# Altium PCB flyback_pcbdesing.PcbDoc
Units mm, origin at the board's own origin, x right, y up, seen from the top; angles counter-clockwise.
Board outline 126.62 x 105.79 mm, 2 copper layers (Top Layer, Bottom Layer); 61 components, 35 nets, 169 pads, 4 vias.
Unrouted connection lines stored in the file: 2.
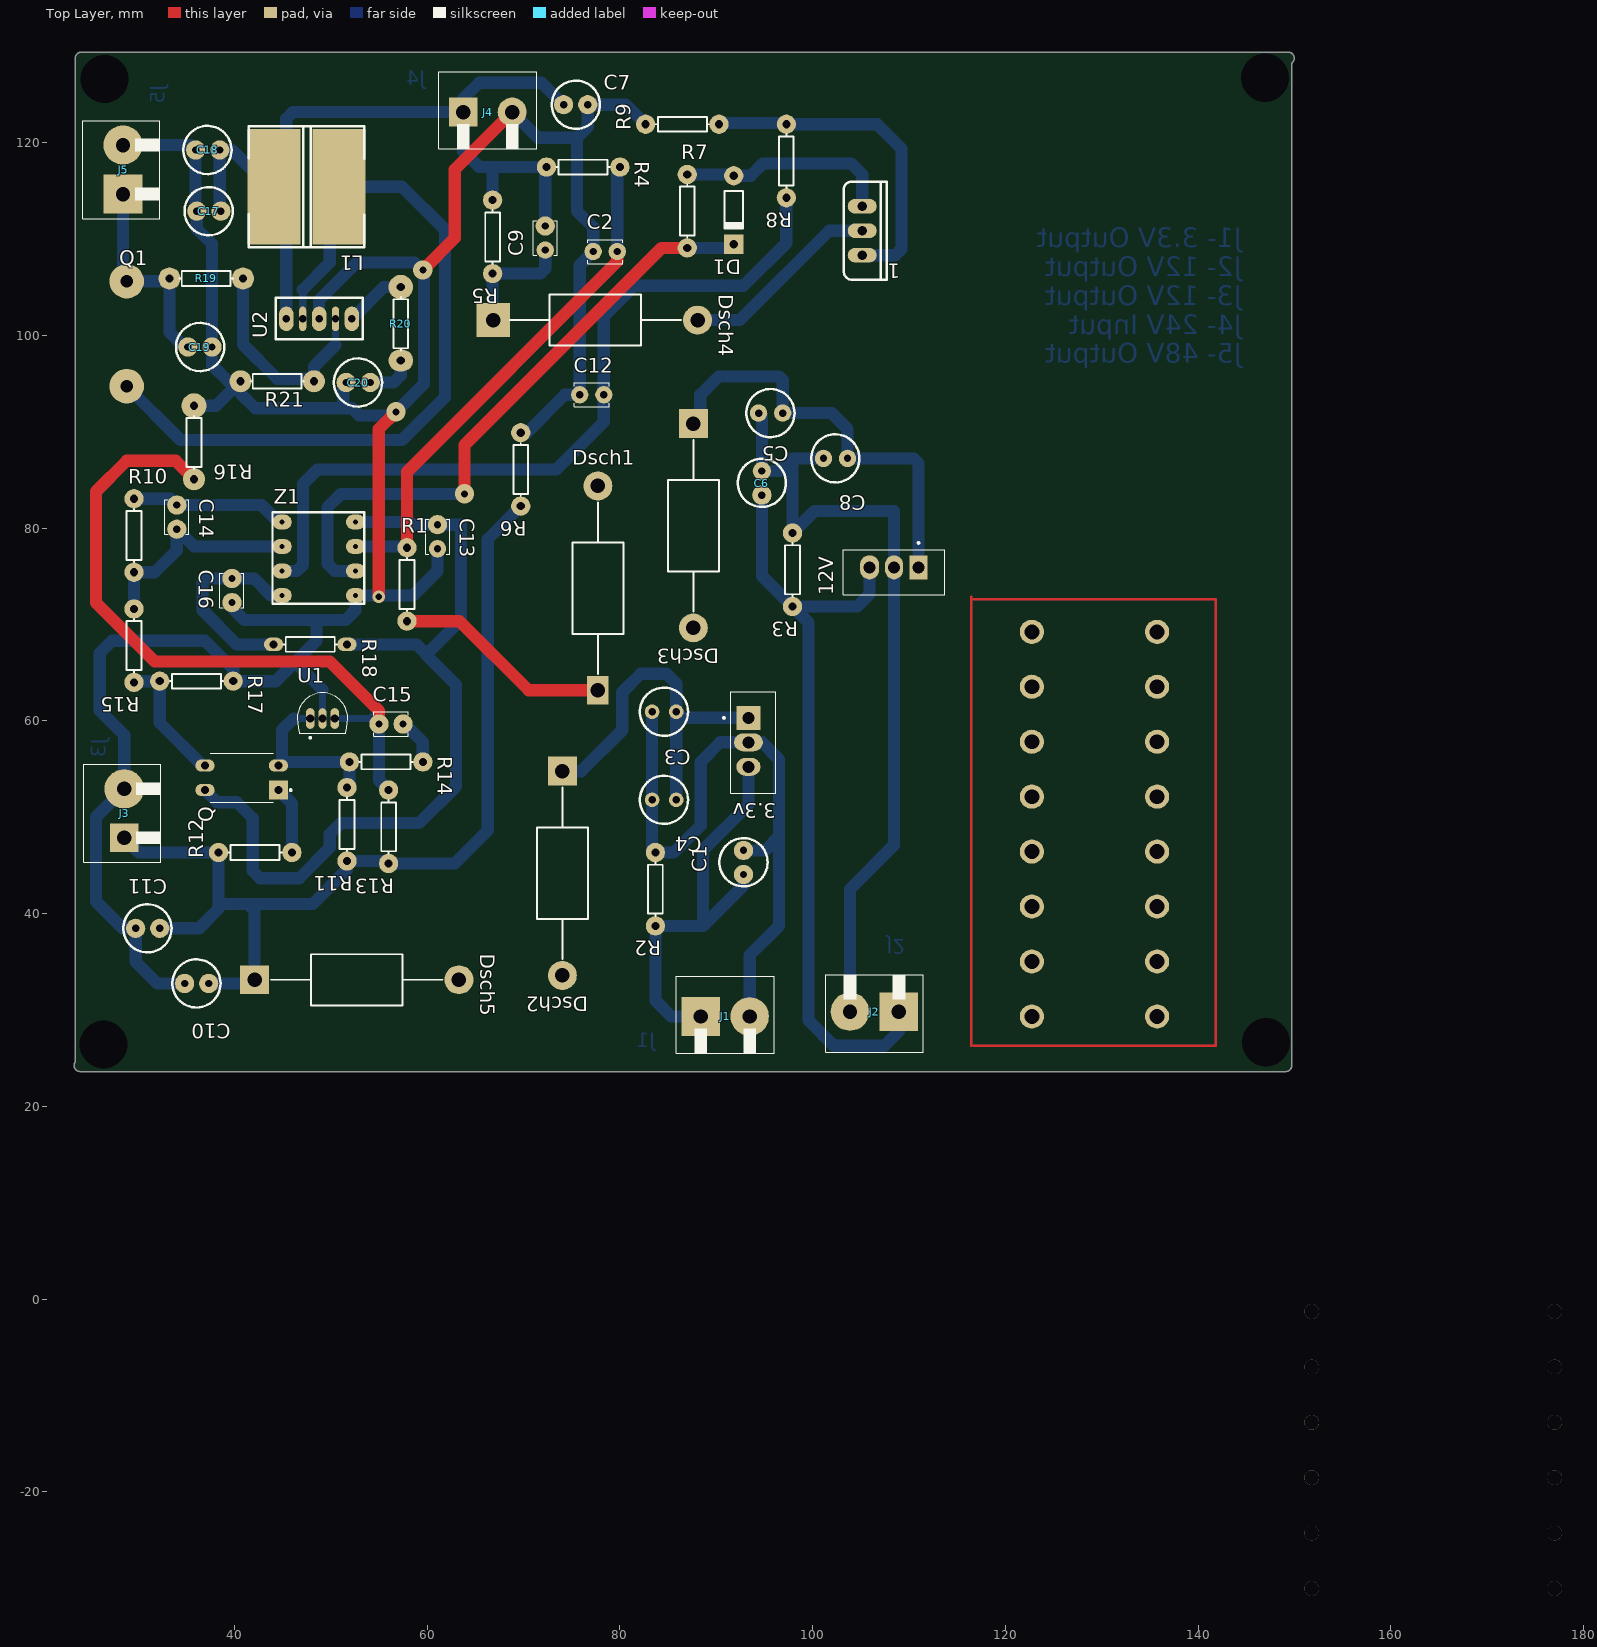
[diagram p0: Top Layer view]
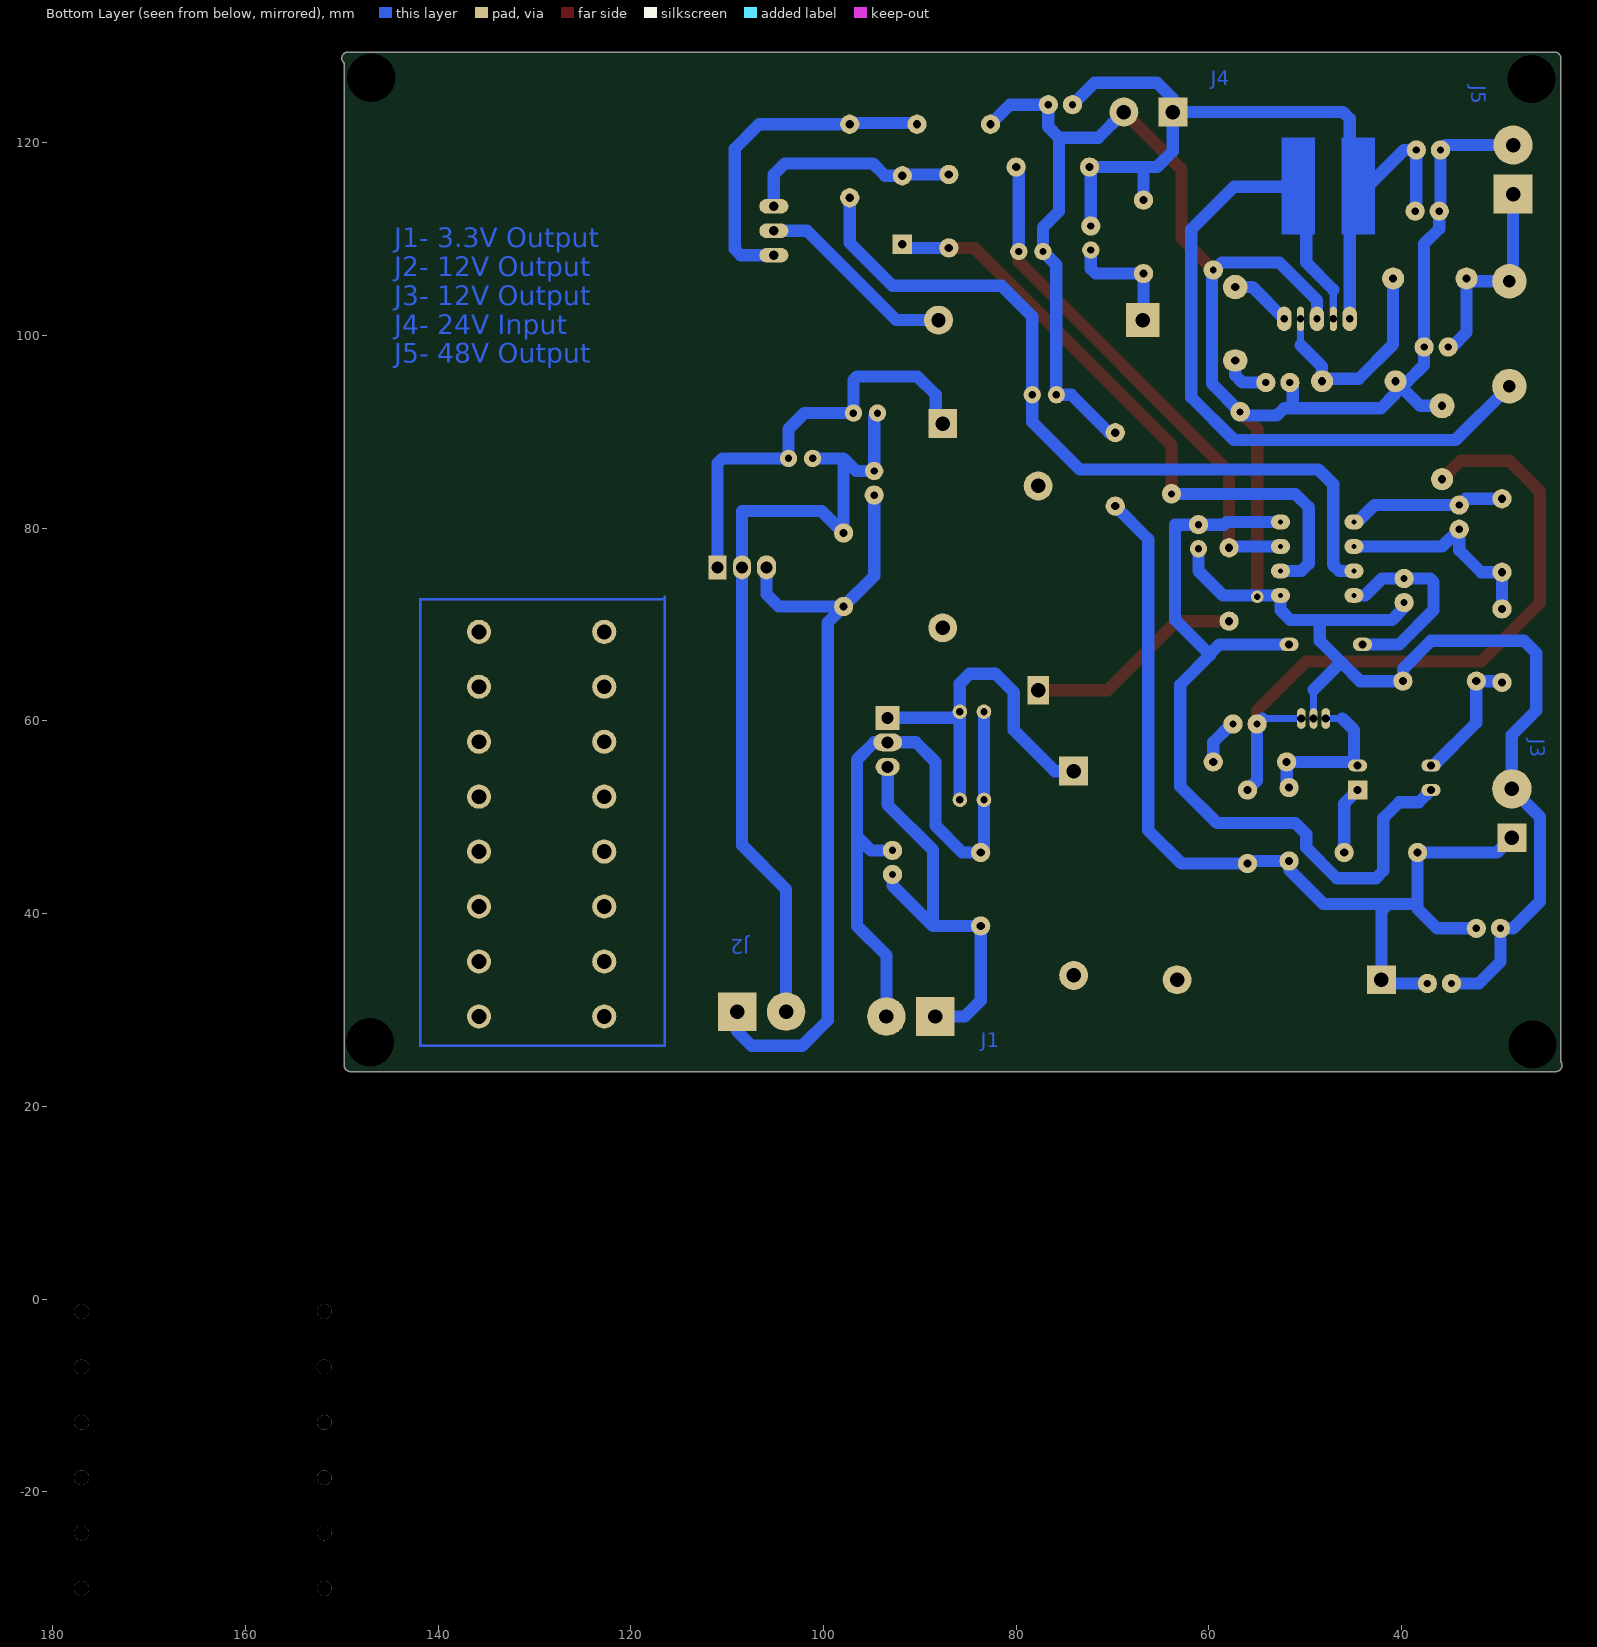
[diagram p1: Bottom Layer view, seen from below]

## Layer stack, top to bottom
Top Solder: solder mask 0.0102, Solder Resist, Dk 3.5
Top Layer: signal copper 0.0356
Dielectric 1: dielectric 0.32, FR-4, Dk 4.8
Bottom Layer: signal copper 0.0356
Bottom Solder: solder mask 0.0102, Solder Resist, Dk 3.5

## Board outline
24.003,23.622 cw(c24.003,24.257) 23.495,24.638 23.495,128.778 cw(c24.13,128.778) 24.13,129.413 149.352,129.413 cw(c149.352,128.778) 149.987,128.778 cw(c149.352,128.778) 149.733,128.27 149.733,24.257 cw(c149.098,24.257) 149.098,23.622

## Design rules (kind name [scope] priority, off if disabled: settings)
Clearance [All] p1: gap=0.254
PolygonConnect [All] p1: connectstyle=Relief reliefconductorwidth=0.254 reliefentries=4 polygonreliefangle="90 Angle" airgapwidth=0.254
RoutingVias [All] p1: holewidth=0.711 width=1.27 viastyle="Through Hole" minholewidth=0.711 minwidth=1.27 maxholewidth=0.711 maxwidth=1.27
SolderMaskExpansion [All] p1: expansion=0.102
Width [All] p1: maxlimit=1.27 minlimit=0.508 preferedwidth=1.27
30 further rules are at their usual default settings.

## Components (designator, comment, footprint, x,y, rotation, side; value= is the part's Value field where it differs from the comment)
1 "IRFZ44NPBF" TO-220 105.156,110.871 r270 top
3.3v "LM7812CT/NOPB" TO254P1054X470X1955-3#1 93.345,57.785 r270 top
12V "LM7812CT/NOPB" TO254P1054X470X1955-3#2 108.458,75.946 r180 top
C1 "Cap" Cap1#1 92.837,44.069 r90 top
C2 "120u" CAP_RCER72A472K0A2H03B#1 78.486,108.712 r0 top
C3 "Cap" Cap1#2 85.852,60.96 r180 top
C4 "Cap" Cap1#2 85.852,51.816 r180 top
C5 "Cap" Cap1#3 96.901,91.948 r180 top
C6 "Cap" Cap1#4 94.742,83.439 r90 top
C7 "Cap" Cap1#1 74.168,123.952 r0 top
C8 "Cap" Cap1#3 103.632,87.249 r180 top
C9 "10nF" CAP_RCER72A472K0A2H03B#2 72.263,110.109 r90 top
C10 "Cap" Cap1#1 37.338,32.766 r180 top
C11 "Cap" Cap1#1 32.258,38.481 r180 top
C12 "470pF" CAP_RCER72A472K0A2H03B#1 77.089,93.853 r0 top
C13 "1u" CAP_RCER72A472K0A2H03B#3 61.087,79.121 r270 top
C14 "10n" CAP_RCER72A472K0A2H03B#4 34.036,81.153 r270 top
C15 "20n" CAP_RCER72A472K0A2H03B#4 56.261,59.69 r0 top
C16 "1n" CAP_RCER72A472K0A2H03B#4 39.751,73.533 r270 top
C17 "Cap" Cap1#1 38.608,112.903 r180 top
C18 "Cap" Cap1#1 38.481,119.253 r180 top
C19 "Cap" Cap1#1 35.179,98.806 r0 top
C20 "Cap" Cap1#1 54.102,95.123 r180 top
D1 "Diode 1N4148" DO-35 91.821,113.03 r270 top
Dsch1 "1N5822" DIOAD2120W130L950D530P#1 77.724,73.787 r90 top
Dsch2 "1N5822" DIOAD2120W130L950D530P#2 74.041,44.196 r270 top
Dsch3 "1N5822" DIOAD2120W130L950D530P#2 87.63,80.264 r270 top
Dsch4 "1N5822" DIOAD2120W130L950D530P#3 77.47,101.6 r0 top
Dsch5 "1N5822" DIOAD2120W130L950D530P#2 52.705,33.147 r0 top
J1 "1760510000" 1760490000#1 88.392,29.337 r0 top
J2 "1760510000" 1760490000#1 108.966,29.845 r180 top
J3 "1760510000" 1760490000#2 28.575,47.879 r90 top
J4 "1760510000" 1760490000#3 63.754,123.19 r0 top
J5 "1760510000" 1760490000#4 28.448,114.681 r90 top
L1 "Inductor" Inductor2 47.498,115.443 r180 top
Q "PC817A" DIP762W50P254L650H458Q4B 40.767,54.102 r180 top
Q1 "DIODE_SCHOTTKY_10MQ100NPBF" Schottky 28.829,87.63 r90 top
R1 "Res1" AXIAL-0.3#1 57.912,74.168 r90 top
R2 "Res1" AXIAL-0.3#1 83.693,42.545 r270 top
R3 "Res1" AXIAL-0.3#1 97.917,75.692 r270 top
R4 "Res1" AXIAL-0.3#1 76.2,117.475 r0 top
R5 "Res1" AXIAL-0.3#1 66.802,110.236 r270 top
R6 "Res1" AXIAL-0.3#1 69.723,86.106 r270 top
R7 "Res1" AXIAL-0.3#1 86.995,112.903 r90 top
R8 "Res1" AXIAL-0.3#1 97.282,118.11 r270 top
R9 "Res1" AXIAL-0.3#1 86.487,121.92 r180 top
R10 "Res1" AXIAL-0.3#1 29.591,79.248 r90 top
R11 "Res1" AXIAL-0.3#1 51.689,49.276 r270 top
R12 "Res1" AXIAL-0.3#1 42.164,46.355 r180 top
R13 "Res1" AXIAL-0.3#1 56.007,49.022 r270 top
R14 "Res1" AXIAL-0.3#1 55.753,55.753 r0 top
R15 "Res1" AXIAL-0.3#1 29.591,67.818 r270 top
R16 "Res1" AXIAL-0.3#2 35.814,88.9 r270 top
R17 "Res1" AXIAL-0.3#1 36.068,64.135 r0 top
R18 "Res1" AXIAL-0.3#3 47.879,67.945 r0 top
R19 "Res" AXIAL-0.3#4 37.084,105.918 r180 top
R20 "Res" AXIAL-0.3#5 57.277,101.219 r90 top
R21 "Res" AXIAL-0.3#4 44.45,95.25 r0 top
U1 "TL431CLP" TO-92 49.149,60.833 r0 top
U2 "LM2585T" LM2585T 52.197,101.727 r180 top
Z1 "TL3842" TL3842_PCBLIB 44.958,80.645 r0 top

## Footprints (in the part's own frame and the unit in brackets; to place one, negate y for a bottom-side part, rotate by r counter-clockwise, add the part's x,y. Pads: shape width x height; smd on the part's side, far side on the other; paste and mask are expansions set on the pad)
1760490000#1 [mm]
  rect 4x4 hole 1.5: 1(0,0)
  round 4 hole 1.5: 2(5.08,0)
  silkscreen extent -2.54,-3.81 7.62,4.2
1760490000#2 [mm]
  rect 3x3 hole 1.5: 1(0,0)
  round 4.079 hole 1.5: 2(5.08,0)
  silkscreen extent -2.54,-3.81 7.62,4.2
1760490000#3 [mm]
  rect 3x3 hole 1.5: 1(0,0)
  round 3 hole 1.5: 2(5.08,0)
  silkscreen extent -2.54,-3.81 7.62,4.2
1760490000#4 [mm]
  rect 4.079x4.079 hole 1.5: 1(0,0)
  round 4.079 hole 1.5: 2(5.08,0)
  silkscreen extent -2.54,-3.81 7.62,4.2
AXIAL-0.3#1 [mm] "Axial Device, Thru-Hole; 2 Leads; 0.3 in Pin Spacing"
  round 2 hole 0.85: 1(-3.81,0) 2(3.81,0)
  silkscreen extent -2.77,-0.76 2.77,0.76
AXIAL-0.3#2 [mm] "Axial Device, Thru-Hole; 2 Leads; 0.3 in Pin Spacing"
  round 2.6 hole 0.85: 1(-3.81,0)
  round 2.3 hole 0.85: 2(3.81,0)
  silkscreen extent -2.77,-0.76 2.77,0.76
AXIAL-0.3#3 [mm] "Axial Device, Thru-Hole; 2 Leads; 0.3 in Pin Spacing"
  oval 2x1.4 hole 0.85: 1(-3.81,0) 2(3.81,0)
  silkscreen extent -2.77,-0.76 2.77,0.76
AXIAL-0.3#4 [mm] "Axial Device, Thru-Hole; 2 Leads; 0.3 in Pin Spacing"
  round 2.289 hole 0.85: 1(-3.81,0) 2(3.81,0)
  silkscreen extent -2.77,-0.76 2.77,0.76
AXIAL-0.3#5 [mm] "Axial Device, Thru-Hole; 2 Leads; 0.3 in Pin Spacing"
  oval 2.289x2.543 hole 0.85: 1(-3.81,0)
  round 2.543 hole 0.85: 2(3.81,0)
  silkscreen extent -2.77,-0.76 2.77,0.76
Cap1#1 [mm]
  round 2 hole 0.762: 1(0,0) 2(2.5,0)
  silkscreen extent -1.23,-2.5 3.77,2.5
Cap1#2 [mm]
  round 1.524 hole 0.762: 1(0,0) 2(2.5,0)
  silkscreen extent -1.23,-2.5 3.77,2.5
Cap1#3 [mm]
  round 1.8 hole 0.762: 1(0,0) 2(2.5,0)
  silkscreen extent -1.23,-2.5 3.77,2.5
Cap1#4 [mm]
  round 2 hole 0.762: 1(0,0)
  round 1.9 hole 0.762: 2(2.5,0)
  silkscreen extent -1.23,-2.5 3.77,2.5
CAP_RCER72A472K0A2H03B#1 [mm]
  round 1.8 hole 0.75: 1(-1.25,0) 2(1.25,0)
  silkscreen extent -1.8,-1.25 1.8,1.25
CAP_RCER72A472K0A2H03B#2 [mm]
  round 1.8 hole 0.75: 1(-1.25,0)
  round 2 hole 0.75: 2(1.25,0)
  silkscreen extent -1.8,-1.25 1.8,1.25
CAP_RCER72A472K0A2H03B#3 [mm]
  round 2 hole 0.75: 1(-1.25,0)
  round 1.8 hole 0.75: 2(1.25,0)
  silkscreen extent -1.8,-1.25 1.8,1.25
CAP_RCER72A472K0A2H03B#4 [mm]
  round 2 hole 0.75: 1(-1.25,0) 2(1.25,0)
  silkscreen extent -1.8,-1.25 1.8,1.25
DIOAD2120W130L950D530P#1 [mm]
  round 3 hole 1.5: A(10.6,0)
  rect 3x2.25 hole 1.5: C(-10.6,0)
  silkscreen extent -8.89,-2.65 8.89,2.65
DIOAD2120W130L950D530P#2 [mm]
  round 3 hole 1.5: A(10.6,0)
  rect 3x3 hole 1.5: C(-10.6,0)
  silkscreen extent -8.89,-2.65 8.89,2.65
DIOAD2120W130L950D530P#3 [mm]
  round 3 hole 1.5: A(10.6,0)
  rect 3.5x3.5 hole 1.5: C(-10.6,0)
  silkscreen extent -8.89,-2.65 8.89,2.65
DIP762W50P254L650H458Q4B [mm]
  rect 2x2 hole 0.85: 1(-3.81,1.27)
  oval 2x1.26 hole 0.85: 2(-3.81,-1.27) 3(3.81,-1.27) 4(3.81,1.27)
  silkscreen extent -5.18,-2.54 3.25,2.54
DO-35 [mm] "Diode, Axial; Body 3.8 x 1.9 mm (LxDia. max), Lead Dia. 0.53 mm (max)"
  round 2 hole 0.9: 1(-3.55,0)
  rect 2x2 hole 0.9: 2(3.55,0)
  silkscreen extent -1.95,-0.95 2.05,0.95
Inductor2 [mm]
  rect 5.5x12 smd: 1(-3.35,0) 2(3.375,0)
  silkscreen extent -6,-6.27 6.03,6.27
LM2585T [mm]
  oval 1.5x2.541 hole 0.762: 1(0,0) 3(3.4,0) 5(6.8,0)
  oval 0.738x2.541 hole 0.762: 2(1.7,0)
  oval 0.737x2.541 hole 0.762: 4(5.1,0)
  silkscreen extent -1.13,-2.18 7.89,2.13
Schottky [mm]
  round 3.578 hole 1.32: 1(7.112,0) 2(18,0)
TL3842_PCBLIB [mm]
  oval 2x1.524 hole 0.52: 1(0,0) 2(0,-2.54) 3(0,-5.08) 4(0,-7.62) 5(7.62,-7.62) 6(7.62,-5.08) 7(7.62,-2.54) 8(7.62,0)
  silkscreen extent -1,-8.5 8.5,1, body extent 0.06,-8.79 7.94,0.79, height 5.08
TO254P1054X470X1955-3#1 [mm]
  rect 2.5x2.5 hole 1.24: 1(-2.54,0)
  oval 1.86x3 hole 1.24: 2(0,0)
  oval 1.86x2.5 hole 1.24: 3(2.54,0)
  silkscreen extent -5.27,-2.64 5.27,2.86
TO254P1054X470X1955-3#2 [mm]
  rect 1.86x2.5 hole 1.24: 1(-2.54,0)
  oval 1.86x2.5 hole 1.24: 2(0,0)
  oval 2x2.5 hole 1.24: 3(2.54,0)
  silkscreen extent -5.27,-2.64 5.27,2.86
TO-92 [mm]
  oval 0.889x2.14 hole 0.85: 1(-1.27,-0.575)
  oval 0.816x2.14 hole 0.85: 2(0,-0.575)
  oval 0.892x2.14 hole 0.85: 3(1.27,-0.575)
  silkscreen extent -2.61,-2.67 2.61,2.09, body extent -2.41,-1.84 2.41,1.84, height 5.34
TO-220 [mm]
  oval 1.508x3.016 hole 1: 1(-2.54,0) 2(0,0) 3(2.54,0)
  silkscreen extent -5.08,-1.91 5.08,2.54

## Part data
1: "RoHS Compliant"
3.3v 12V: "1.5-A, 30-V, linear voltage regulator 3-TO-220 -40 to 125"
C1 C3 C4 C5 C6 C7 C8 C10 C11 C17 C18 C19 C20: "Capacitor"
C2 C9 C12 C13 C14 C15 C16: library part RCER72A472K0A2H03B, "Cap Ceramic 1pF 50V C0G 0.25pF Radial 2.5mm 125C Automotive Bulk"
D1: "High Conductance Fast Diode"
Dsch1 Dsch2 Dsch3 Dsch4 Dsch5: "Diode Schottky 40V 3A Through Hole"
J1 J2 J3 J4 J5: "2 Position Wire to Board Terminal Block Horizontal with Board 0.200 _5.08mm_ Through Hole"
Q: "Optoisolator Transistor Output 5000Vrms 1 Channel 4-DIP"
Q1: "Diode Schottky SMD 100V 2A SMA"
R1 R2 R3 R4 R5 R6 R7 R8 R9 R10 R11 R12 R13 R14 R15 R16 R17 R18: "Resistor"
R19 R20 R21: library part Res1, "Resistor"
U1: "Adjustable precision shunt regulator 3-TO-92 0 to 70"

## Free pads (board coordinates)
  round 1.524 hole 1.54: 0(151.8,-30.023) 0(151.8,-24.273) 0(151.8,-18.523) 0(151.8,-12.773) 0(151.8,-7.023) 0(151.8,-1.273) 0(177,-30.023) 0(177,-24.273) 0(177,-18.523) 0(177,-12.773) 0(177,-7.023) 0(177,-1.273)
  round 2.5 hole 1.54: 24(122.755,29.337) 24(122.755,40.741) 24(122.755,52.145) 24(122.755,63.549) 25(122.755,35.039) 25(122.755,46.443) 25(122.755,57.847) 25(122.755,69.251)
  round 2.5 hole 1.54 paste+0: 24(135.755,29.337) 24(135.755,40.741) 24(135.755,52.145) 24(135.755,63.549) 25(135.755,35.039) 25(135.755,46.443) 25(135.755,57.847) 25(135.755,69.251)
  round 1.524 hole 5: 25(26.416,26.416) 25(26.543,126.619) 25(146.939,126.746) 25(147.066,26.67)

## Via types
v1: diameter 2, hole 0.711, Top Layer to Bottom Layer, 3 vias
v2: diameter 1.27, hole 0.711, Top Layer to Bottom Layer, 1 vias

## Nets (pads, with @x,y where several pads share a name; then routed paths per layer and width w, separated by ;. In a path a pad name is that pad's centre, name@x,y a point inside that pad or via, vN(x,y) a via of type N, cw(c..) or ccw(c..) an arc to the next point about the centre after c; other vN are vias at no path point)
3.3V: 3.3v.3 C1.1 J1.1 R2.2 | length 43.6
  Bottom Layer w1.27: J1.1 85.344,29.337 83.693,30.988 R2.2 88.646,38.735 ; C1.1 92.837,42.926 88.646,38.735 ; 3.3v.3 93.345,51.308 88.646,46.609 88.646,38.735
5U_NOKTASIZ: Dsch2.A
12V: 12V.3 C6.1 J2.1 R3.2 | length 81
  Bottom Layer w1.27: C6.1 94.742,75.057 R3.2 ; 12V.3 105.918,73.152 104.648,71.882 R3.2 ; J2.1 108.966,27.813 107.442,26.289 102.235,26.289 99.568,28.956 99.568,70.231 R3.2
12V_FB: C10.1 C11.1 Dsch5.C J3.1 R6.2 R11.2 R12.2 R13.2 | length 108.5
  Bottom Layer w1.27: J3.1 30.099,46.355 R12.2 ; C11.1 36.322,38.481 38.354,40.513 R12.2 ; C10.1 41.724,32.766 Dsch5.C 42.105,40.318 41.402,41.021 ; R6.2 66.294,78.867 66.294,48.641 62.865,45.212 R13.2 55.753,45.466 R11.2 51.689,44.577 48.133,41.021 41.402,41.021 ; R12.2 38.354,41.021 41.402,41.021
22U_NOKTASIZ: Dsch5.A
22UH_1PRIMER: 1.2 Dsch4.A | length 20.9
  Bottom Layer w1.27: Dsch4.A 92.456,101.6 101.727,110.871 1.2
22UH_AUXNOKTALI: C2.1 C7.2 C10.2 C11.2 C12.1 C13.2 C16.2 C17.2 C18.2 C19.2 C20.2 J3.2 J4.2 J5.2 R6.1 R9.2 R16.1 R17.2 R21.1 U1.2 U2.3 Z1.5 | length 293.5
  Top Layer w1.27: v2(54.991,72.898) 54.991,90.297 v1(56.769,92.075) ; v1(59.563,106.807) 62.865,110.109 62.865,117.221 J4.2
  Bottom Layer w0.762: U1.2 49.149,63.246
  Bottom Layer w1.27: J5.2 35.473,119.761 C18.2 35.981,113.03 C17.2 36.108,111.085 37.679,109.514 C19.2 37.679,96.941 39.37,95.25 R21.1 ; C10.2 32.004,32.766 29.758,35.012 C11.2 28.448,38.481 25.654,41.275 25.654,50.038 J3.2 28.575,58.547 26.035,61.087 26.035,67.056 27.305,68.326 36.957,68.326 39.878,65.405 R17.2 44.323,64.135 46.228,66.04 ; R16.1 38.1,92.71 R21.1 ; C16.2 39.751,71.755 41.021,70.485 48.514,70.485 ; U2.3 48.797,103.661 52.705,107.569 58.674,107.569 59.69,106.553 59.69,94.996 v1(56.769,92.075) 56.388,91.694 52.959,91.694 52.197,92.456 42.164,92.456 40.64,93.98 R21.1 ; 49.149,63.246 46.355,66.04 46.228,66.04 ; 51.308,92.456 51.308,94.829 C20.2 ; C13.2 61.087,75.565 58.547,73.025 Z1.5 52.578,71.501 51.562,70.485 48.514,70.485 ; J4.2 71.501,120.523 75.565,120.523 ; R6.1 70.358,89.916 74.295,93.853 C12.1 75.839,107.315 C2.1 77.236,111.232 75.565,112.903 75.565,120.523 ; R9.2 80.645,123.952 C7.2 76.668,121.626 75.565,120.523 ; 46.228,66.04 48.514,68.326 48.514,70.485
22UH_AUXNOKTASIZ: Dsch1.A
22UH_NOKTA1: C7.1 C9.2 C17.1 C18.1 J4.1 L1.2 R4.1 R5.1 U2.5 | length 91.6
  Bottom Layer w1.27: C17.1 38.481,113.03 C18.1 39.751,119.253 43.815,115.189 43.815,115.062 45.397,113.48 ; U2.5 45.397,113.48 ; R5.1 66.802,117.475 ; C9.2 72.263,117.348 R4.1 65.405,117.475 63.754,119.126 J4.1 ; C7.1 73.596,124.523 72.453,125.666 71.882,126.238 65.405,126.238 63.754,124.587 J4.1 ; 45.397,113.48 45.397,122.486 46.101,123.19 J4.1
25U_NOKTASIZ: Dsch3.A
48VOUT: C19.1 J5.1 Q1.2 R19.2 | length 21.9
  Bottom Layer w1.27: J5.1 28.448,106.011 Q1.2 32.986,105.63 R19.2 33.274,100.33 34.798,98.806 C19.1
GND1: 3.3v.2 C1.2 C3.2 C4.2 J1.2 R2.1 | length 69.1
  Bottom Layer w1.27: C3.2 C4.2 83.352,46.696 R2.1 85.598,46.355 88.392,49.149 88.392,55.753 90.424,57.785 3.3v.2 94.742,57.785 96.52,56.007 96.52,48.006 ; C1.2 95.083,46.569 96.52,48.006 ; J1.2 93.472,35.687 96.52,38.735 96.52,48.006
GND2: 12V.2 C5.2 C6.2 C8.2 J2.2 R3.1 | length 86.5
  Bottom Layer w1.27: C5.2 94.742,91.607 C6.2 96.607,85.939 97.917,87.249 ; C8.2@100.878,87.503 C8.2 97.917,87.249 ; J2.2 103.886,42.545 108.458,47.117 12V.2 108.458,81.788 100.203,81.788 R3.1 97.917,87.249
IFB: C12.2 R8.2 Z1.3 | length 82.4
  Bottom Layer w1.27: Z1.3 46.482,75.565 47.117,76.2 47.117,84.582 48.641,86.106 73.406,86.106 78.339,91.039 C12.2 78.339,101.961 81.534,105.156 92.837,105.156 97.282,109.601 R8.2
Net1_1: 1.1 D1.1 R7.2 | length 22.5
  Bottom Layer w1.27: R7.2 91.688,116.713 D1.1 93.593,116.58 94.869,117.856 104.013,117.856 105.156,116.713 1.1
Net1_3: 1.3 R8.1 R9.1 | length 34.8
  Bottom Layer w1.27: R9.1 90.424,122.047 R8.1@97.282,122.047 ; R8.1 106.68,121.92 109.22,119.38 109.22,108.966 108.585,108.331 1.3
Net3.3v_1: 3.3v.1 C3.1 C4.1 Dsch2.C | length 38.5
  Bottom Layer w1.27: Dsch2.C 76.005,54.796 80.264,59.055 80.264,62.992 82.169,64.897 84.836,64.897 85.852,63.881 C3.1 ; C4.1 C3.1 ; 3.3v.1 86.487,60.325 C3.1
Net12V_1: 12V.1 C5.1 C8.1 Dsch3.C | length 44.1
  Bottom Layer w1.27: Dsch3.C@88.358,91.533 88.358,93.853 90.263,95.758 96.52,95.758 96.901,95.377 C5.1 101.981,91.948 103.632,90.297 C8.1 110.49,87.249 110.998,86.741 12V.1
NetC9_1: C9.1 Dsch4.C R5.2 | length 12.5
  Bottom Layer w1.27: Dsch4.C 66.802,101.668 R5.2 71.755,106.426 72.263,106.934 C9.1
NetC14_1: C14.1 R10.2 Z1.1 | length 16.4
  Bottom Layer w1.27: R10.2 33.381,83.058 C14.1 42.819,82.403 44.577,80.645 Z1.1
NetC15_1: C15.1 R13.1 R16.2 U1.3 | length 71.3
  Top Layer w1.27: R16.2 33.909,86.995 28.829,86.995 25.654,83.82 25.654,72.263 31.75,66.167 49.911,66.167 55.011,61.067 C15.1
  Bottom Layer w0.762: U1.3 C15.1@54.443,60.258
  Bottom Layer w1.27: C15.1@54.443,60.258 C15.1 55.011,53.828 R13.1
NetC15_2: C15.2 R14.2 | length 4.9
  Bottom Layer w1.27: C15.2 57.658,59.69 59.563,57.785 R14.2
NetC16_1: C16.1 R18.1 Z1.4 | length 20.9
  Bottom Layer w1.27: R18.1 40.259,67.945 36.703,71.501 36.703,74.422 37.064,74.783 C16.1 42.057,74.783 43.815,73.025 Z1.4
NetC20_1: C20.1 R20.1 | length 5
  Bottom Layer w1.27: C20.1 56.515,95.123 57.277,95.885 R20.1
NetDsch1_C: Dsch1.C R1.1 | length 24.9
  Top Layer w1.27: 60.071,70.358 R1.1 63.373,70.358 70.544,63.187 Dsch1.C
NetL1_1: L1.1 Q1.1 U2.4 | length 83.2
  Bottom Layer w0.762: U2.4 47.097,104.755
  Bottom Layer w1.27: Q1.1 34.417,89.154 57.404,89.154 61.849,93.599 61.849,110.998 57.404,115.443 49.911,115.443 49.911,107.569 47.097,104.755
NetQ_1: Q.1 R12.1 | length 7.1
  Bottom Layer w1.27: Q.1 45.974,51.435 R12.1
NetQ_2: Q.2 R11.1 R14.1 U1.1 | length 17
  Bottom Layer w0.762: 46.161,60.258 U1.1@47.852,60.258
  Bottom Layer w1.27: Q.2 Q.2@44.958,55.753 ; 46.161,60.258 44.958,59.055 Q.2@44.958,55.753 ; R11.1 51.943,53.34 R14.1 Q.2@44.958,55.753
NetQ_3: Q.3 R15.2 R17.1 | length 13.6
  Bottom Layer w1.27: R15.2 29.718,64.135 R17.1 32.258,59.817 36.703,55.372 Q.3
NetR19_1: R19.1 R21.2 U2.2 | length 23.2
  Bottom Layer w0.762: 50.497,99.011 U2.2
  Bottom Layer w1.27: R19.1 40.894,99.06 44.45,95.504 48.006,95.504 R21.2 48.26,96.774 50.497,99.011
NetR20_2: R20.2 U2.1 | length 6.4
  Bottom Layer w1.27: U2.1 55.499,105.029 R20.2
PWM: D1.2 R7.1 Z1.6 | length 65.5
  Top Layer w1.27: v1(63.881,83.566) 63.881,88.646 84.328,109.093 R7.1
  Bottom Layer w1.27: Z1.6 50.419,75.565 49.657,76.327 49.657,82.169 51.054,83.566 v1(63.881,83.566) ; R7.1 91.434,109.093 D1.2
VAUX: C2.2 R1.2 R4.2 Z1.7 | length 54
  Top Layer w1.27: R1.2 57.912,85.852 79.736,107.676 C2.2
  Bottom Layer w1.27: Z1.7 57.785,78.105 R1.2 ; C2.2 79.736,117.201 R4.2
VFB: C14.2 R10.1 R15.1 Z1.2 | length 23
  Bottom Layer w1.27: R15.1 R10.1 31.75,75.438 34.036,77.724 C14.2 35.834,78.105 Z1.2
VREF: C13.1 Q.4 R18.2 Z1.8 | length 87.5
  Bottom Layer w1.27: Q.4 38.227,51.562 40.259,51.562 41.91,49.911 41.91,44.45 42.672,43.688 46.736,43.688 49.911,46.863 49.911,48.26 51.054,49.403 59.182,49.403 62.992,53.213 62.992,63.754 59.88,66.865 63.52,70.505 63.52,80.371 C13.1 58.44,80.371 58.166,80.645 Z1.8 ; R18.2 58.928,67.945 59.944,66.929
copper on no net: | length 0.3
  Bottom Layer w0.254: 116.459,26.289 116.713,26.289

## Other copper
Bottom Layer:
  rectangle net NetL1_1: 49.022,110.49 52.451,120.523
  rectangle net 22UH_NOKTA1: 42.799,110.49 46.228,120.523
  text "J1- 3.3V Output / J2- 12V Output / J3- 12V Output / J4- 24V Input / J5- 48V Output" at 144.526,97.155 h2
Multi-Layer:
  lines w0.254: 116.459,26.289 116.459,72.898 ; 116.713,26.289 141.859,26.289 141.859,72.644 116.713,72.644